# Altium PCB PCB_Ultrasonic_rx.pcbdoc
Units mil, origin at the board's own origin, x right, y up, seen from the top; angles counter-clockwise.
Board outline 4380 x 2865 mil, 2 copper layers (Top Layer, Bottom Layer); 54 components, 31 nets, 196 pads, 41 vias.
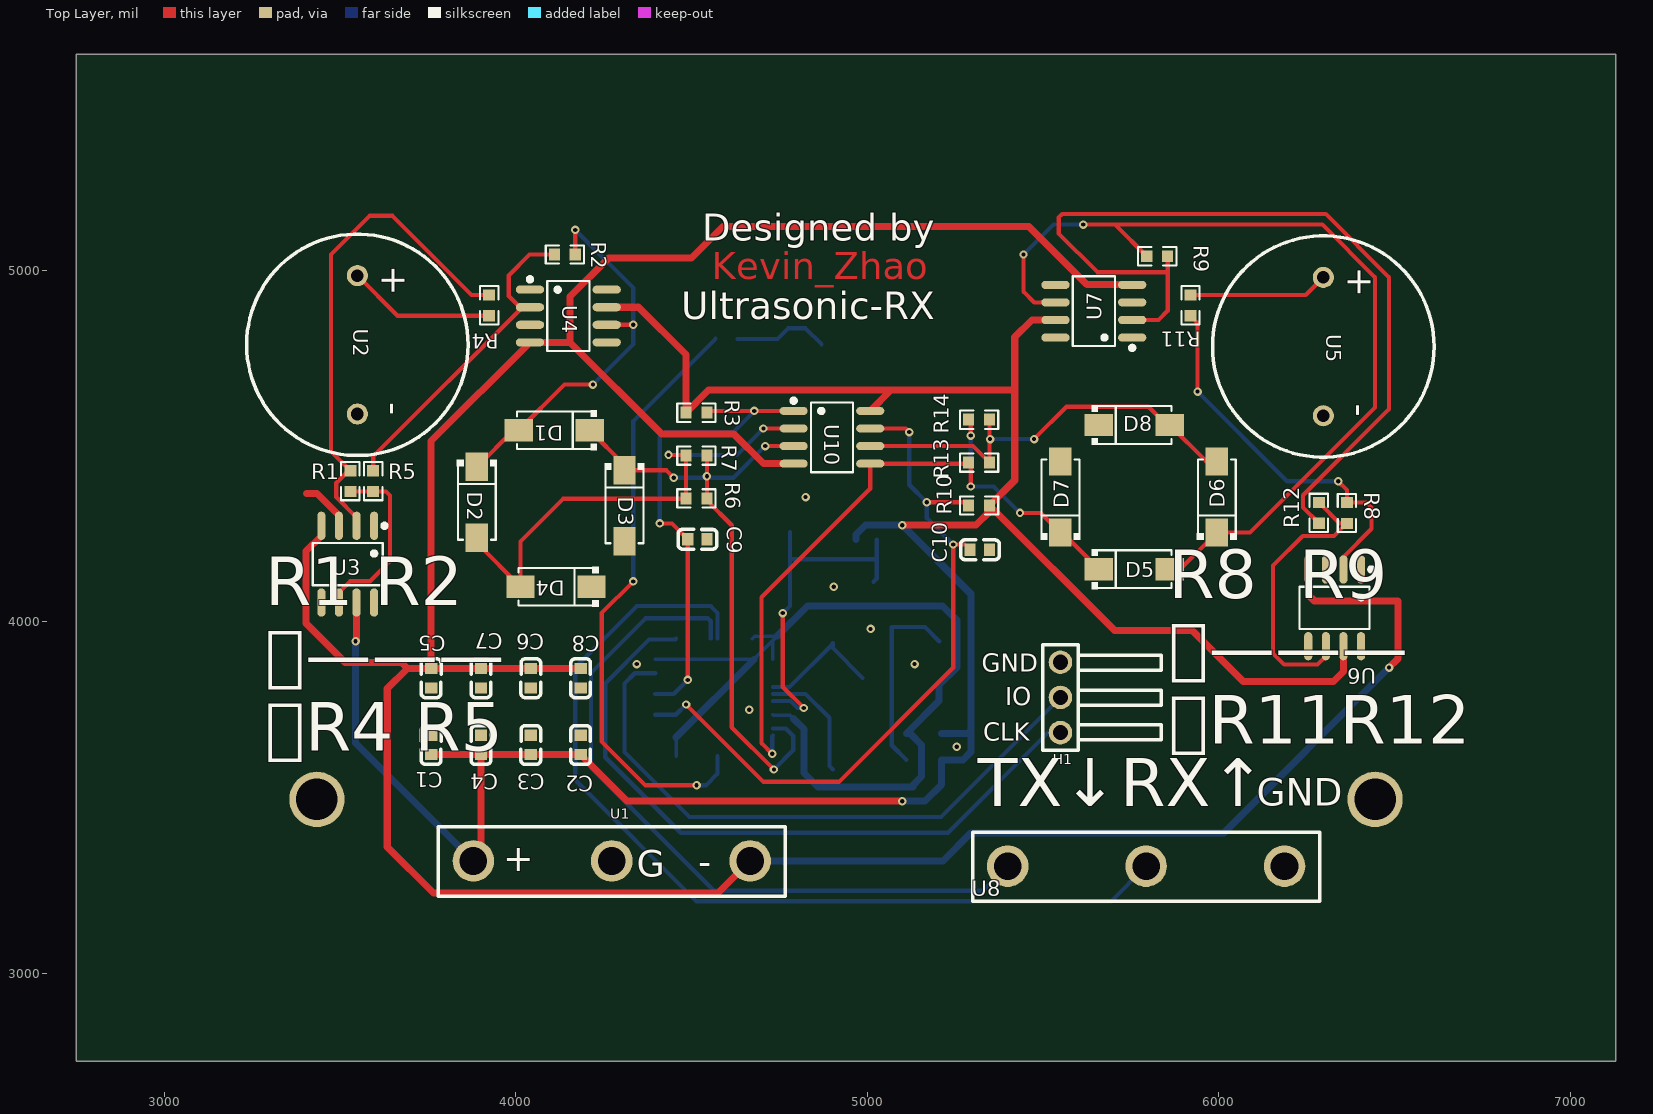
[diagram p0: Top Layer view]
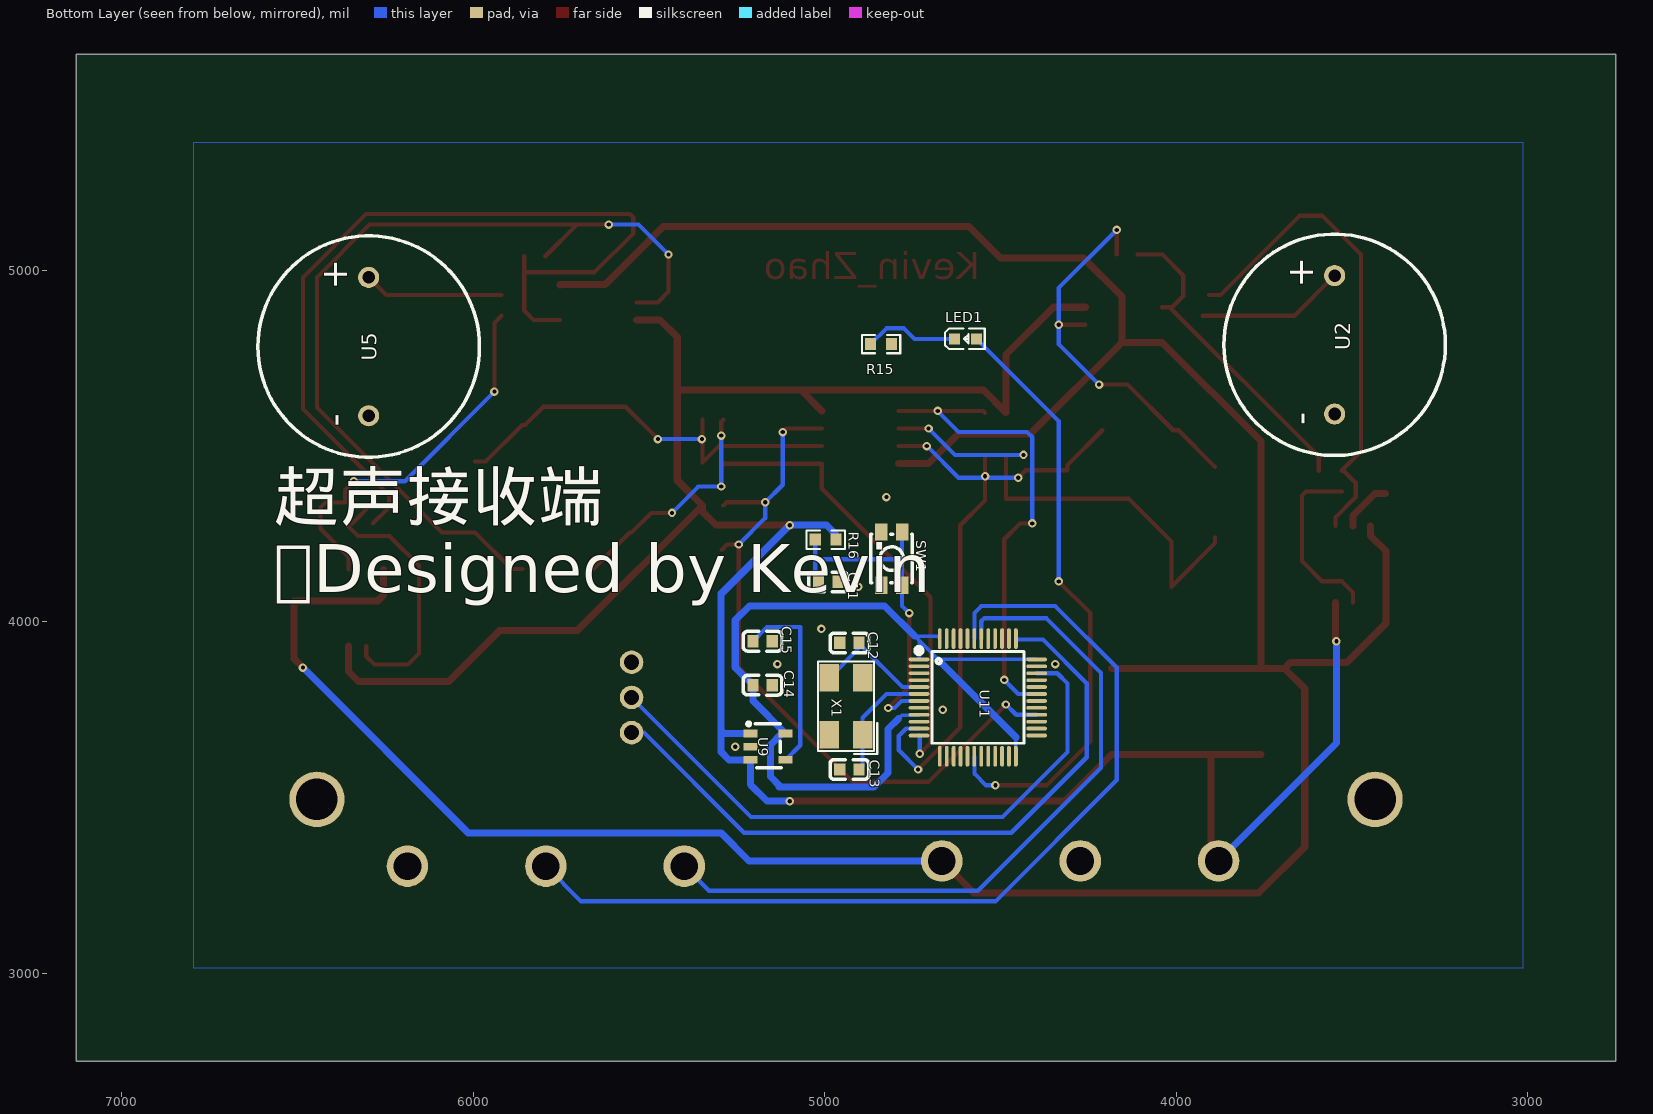
[diagram p1: Bottom Layer view, seen from below]

## Layer stack, top to bottom
Top Solder: solder mask 0.4, Solder Resist, Dk 3.5
Top Layer: signal copper 1.4
Dielectric 1: dielectric 12.6, FR-4, Dk 4.8
Bottom Layer: signal copper 1.4
Bottom Solder: solder mask 0.4, Solder Resist, Dk 3.5

## Board outline
7130,2750 2750,2750 2750,5615 7130,5615

## Components (designator, comment, footprint, x,y, rotation, side; value= is the part's Value field where it differs from the comment)
C1 "0.1u" C0603 3760,3649.8 r90 top
C2 "0.1u" C0603 4185.21,3649.8 r90 top
C3 "0.1u" C0603 4043.48,3649.8 r90 top
C4 "0.1u" C0603 3901.74,3649.8 r90 top
C5 "0.1u" C0603 3760,3840 r90 top
C6 "0.1u" C0603 4043.48,3840 r90 top
C7 "0.1u" C0603 3901.74,3840 r90 top
C8 "0.1u" C0603 4185.21,3840 r90 top
C9 "20p" C0603 4517.44,4235 r180 top
C10 "20p" C0603 5320.8,4205.21 r180 top
C11 "CAP_0603" C0603 4990.61,4113.82 r0 bottom
C12 "20p" C0603 4930.12,3940 r180 bottom
C13 "20p" C0603 4930.12,3580 r180 bottom
C14 "CAP_0603" C0603 5177.44,3820 r0 bottom
C15 "CAP_0603" C0603 5177.44,3945 r0 bottom
D1 "SS14FL" SMA_L4.4-W2.8-LS5.4-RD 4110,4545 r180 top
D2 "SS14FL" SMA_L4.4-W2.8-LS5.4-RD 3890,4340 r270 top
D3 "SS14FL" SMA_L4.4-W2.8-LS5.4-RD 4310,4330 r270 top
D4 "SS14FL" SMA_L4.4-W2.8-LS5.4-RD 4115,4100 r180 top
D5 "SS14FL" SMA_L4.4-W2.8-LS5.4-RD 5760,4150 r0 top
D6 "SS14FL" SMA_L4.4-W2.8-LS5.4-RD 5995,4355 r90 top
D7 "SS14FL" SMA_L4.4-W2.8-LS5.4-RD 5550,4355 r90 top
D8 "SS14FL" SMA_L4.4-W2.8-LS5.4-RD 5760,4560 r0 top
H1 "2.54-1*3P正弯针" HDR-TH_3P-P2.54-H-M-BW7.2-P 5550,3785 r90 top
LED1 "LED_0603-G" LED0603-RD 4600,4805 r180 bottom
R1 "22k" R0603 3530,4400.34 r270 top
R2 "22k" R0603 4140.34,5045 r0 top
R3 "4.7k" R0603 4514.64,4595 r0 top
R4 "1k" R0603 3925,4900.34 r90 top
R5 "1k" R0603 3595,4400.34 r90 top
R6 "120" R0603 4514.64,4351.11 r180 top
R7 "120" R0603 4514.64,4473.05 r0 top
R8 "22k" R0603 6365,4309.66 r270 top
R9 "22k" R0603 5825.34,5040 r180 top
R10 "4.7k" R0603 5318.61,4331.11 r180 top
R11 "1k" R0603 5920,4900.34 r270 top
R12 "1k" R0603 6285,4310 r270 top
R13 "120" R0603 5318.61,4453.05 r180 top
R14 "120" R0603 5318.61,4575 r180 top
R15 "Res_0603" R0603 4840.34,4790 r180 bottom
R16 "Res_0603" R0603 4997.71,4233.82 r180 bottom
SW1 "K2-1809SN-A4DW-06" KEY-SMD_4P-L3.5-W3.0-P1.50-LS4.6 4810,4180 r270 bottom
U1 "PAD-10-3" PAD-10-3 3780,3220 r0 top
U2 "超声传感器" 超声传感器 3550,4985 r270 top
U3 "OP07CSZ_C15360" SOIC-8_L4.9-W3.9-P1.27-LS6.0-BL 3522.63,4164.18 r180 top
U4 "OP07CSZ_C15360" SOIC-8_L4.9-W3.9-P1.27-LS6.0-BL 4150,4870 r270 top
U5 "超声传感器" 超声传感器 6297.76,4980 r270 top
U6 "OP07CSZ_C15360" SOIC-8_L4.9-W3.9-P1.27-LS6.0-BL 6330,4040 r180 top
U7 "OP07CSZ_C15360" SOIC-8_L4.9-W3.9-P1.27-LS6.0-BL 5645,4883.75 r90 top
U8 "PAD-10-3" PAD-10-3 5300,3205 r0 top
U9 "MIC5205-3.3YM5-TR" SOT-23-5_L3.0-W1.7-P0.95-LS2.8-TL 5161.73,3644.92 r180 bottom
U10 "LM393_C3294651" SOP-8_L5.0-W4.0-P1.27-LS6.0-BL 4900,4525 r270 top
U11 "STM32F103C6T6A" LQFP-48_L7.0-W7.0-P0.50-LS9.0-BL 4565,3785 r270 bottom
X1 "TAXM8M4QLDCDT2T" OSC-SMD_4P-L5.0-W3.2-BL 4940,3760 r90 bottom

## Footprints (in the part's own frame and the unit in brackets; to place one, negate y for a bottom-side part, rotate by r counter-clockwise, add the part's x,y. Pads: shape width x height; smd on the part's side, far side on the other; paste and mask are expansions set on the pad)
C0603 [mm]
  rect 0.8x0.9 smd: 1(-0.7,0) 2(0.7,0)
  silkscreen extent -1.41,-0.71 1.39,0.72
HDR-TH_3P-P2.54-H-M-BW7.2-P [mil]
  round 66.9 hole 43.3: 1(-100,0) 2(0,0) 3(100,0)
  silkscreen extent -150,-286 150,50
KEY-SMD_4P-L3.5-W3.0-P1.50-LS4.6 [mm]
  rect 1.25x0.9 smd: 1(-1.925,-0.75) 2(1.925,-0.75) 3(-1.925,0.75) 4(1.925,0.75)
  silkscreen extent -1.75,-1.5 1.75,1.5
LED0603-RD [mm]
  rect 0.8x0.8 smd: 1(-0.799,-0.003) 2(0.799,0.003)
  silkscreen extent -1.49,-0.75 1.39,0.76
LQFP-48_L7.0-W7.0-P0.50-LS9.0-BL [mm]
  oval 0.27x1.5 smd: 1(-2.75,-4.25) 2(-2.25,-4.25) 3(-1.75,-4.25) 4(-1.25,-4.25) 5(-0.75,-4.25) 6(-0.25,-4.25) 7(0.25,-4.25) 8(0.75,-4.25) 9(1.25,-4.25) 10(1.75,-4.25) 11(2.25,-4.25) 12(2.75,-4.25) 25(2.75,4.25) 26(2.25,4.25) 27(1.75,4.25) 28(1.25,4.25) 29(0.75,4.25) 30(0.25,4.25) 31(-0.25,4.25) 32(-0.75,4.25) 33(-1.25,4.25) 34(-1.75,4.25) 35(-2.25,4.25) 36(-2.75,4.25)
  oval 1.5x0.27 smd: 13(4.25,-2.75) 14(4.25,-2.25) 15(4.25,-1.75) 16(4.25,-1.25) 17(4.25,-0.75) 18(4.25,-0.25) 19(4.25,0.25) 20(4.25,0.75) 21(4.25,1.25) 22(4.25,1.75) 23(4.25,2.25) 24(4.25,2.75) 37(-4.25,2.75) 38(-4.25,2.25) 39(-4.25,1.75) 40(-4.25,1.25) 41(-4.25,0.75) 42(-4.25,0.25) 43(-4.25,-0.25) 44(-4.25,-0.75) 45(-4.25,-1.25) 46(-4.25,-1.75) 47(-4.25,-2.25) 48(-4.25,-2.75)
  silkscreen extent -3.59,-4.46 3.3,3.34
OSC-SMD_4P-L5.0-W3.2-BL [mil]
  rect 78.7x55.1 smd: 1(-80.7,-47.2) 2(80.7,-47.2) 3(80.7,47.2) 4(-80.7,47.2)
  silkscreen extent -136,-89 127,80
PAD-10-3 [mm]
  round 3 hole 2: 1(2.54,2.54) 2(12.54,2.54) 3(22.54,2.54)
  silkscreen extent 0,0 25.08,5
R0603 [mil]
  rect 31.75x34.02 smd: 1(-29.66,0) 2(29.66,0)
  silkscreen extent -55,-26 55,26
SMA_L4.4-W2.8-LS5.4-RD [mil]
  rect 80.57x63.78 smd: 1(-101,0) 2(101,0)
  silkscreen extent -121,-57 106,57
SOIC-8_L4.9-W3.9-P1.27-LS6.0-BL [mm]
  oval 0.588x2.045 smd: 1(-1.905,-2.772) 2(-0.635,-2.772) 3(0.635,-2.772) 4(1.905,-2.772) 5(1.905,2.772) 6(0.635,2.772) 7(-0.635,2.772) 8(-1.905,2.772)
  silkscreen extent -2.8,-2.92 2.53,1.52
SOP-8_L5.0-W4.0-P1.27-LS6.0-BL [mil]
  oval 22.6x80.14 smd: 1(-75,-108.97) 2(-25,-108.97) 3(25,-108.97) 4(75,-108.97) 5(75,108.97) 6(25,108.97) 7(-25,108.97) 8(-75,108.97)
  silkscreen extent -110,-115 99,60
SOT-23-5_L3.0-W1.7-P0.95-LS2.8-TL [mm]
  rect 1x0.55 smd: 1(-1.271,0.95) 2(-1.271,0) 3(-1.271,-0.95) 4(1.271,-0.95) 5(1.271,0.95)
  silkscreen extent -1.52,-1.52 0.97,1.78
超声传感器 [mil]
  round 60 hole 36: 1(0,0) 2(393.7,0)
  silkscreen extent -118,-315 512,315

## Free pads (board coordinates)
  round 157.48 hole 118.11: 1(3435,3495) 2(6445,3495)

## Via types
v1: diameter 24, hole 12, Top Layer to Bottom Layer, 41 vias

## Nets (pads, with @x,y where several pads share a name; then routed paths per layer and width w, separated by ;. In a path a pad name is that pad's centre, name@x,y a point inside that pad or via, vN(x,y) a via of type N, cw(c..) or ccw(c..) an arc to the next point about the centre after c; other vN are vias at no path point)
$1N68: R4.1 | length 422.4
  Top Layer w12: 3550,4985 3664.32,4870.68 R4.1
$1N69: R2.1 U4.2 | length 928.1
  Top Layer w12: 3595,4430 3595,4470 U4.2@4020,4895 ; U4.2 U4.2@4020,4895 ; R2.1 4040,5045 3980.59,4985.59 3980.59,4926.57 4012.17,4895 U4.2@4020,4895
$1N70: D2.1 U4.6 | length 1128.8
  Top Layer w12: D2.1 3994,4545 4009,4545 4139,4675 v1(4220,4675) ; 4170,5045 v1(4170,5115) ; U4.6 v1(4335,4845)
  Bottom Layer w12: v1(4170,5115) 4335,4950 v1(4335,4845) 4335,4790 v1(4220,4675)
$1N119: R7.1 U10.2 | length 1400.7
  Top Layer w12: 3890,4239 3890,4224 4014,4100 4014,4229 4135,4350 4483.87,4350 4484.98,4351.11 R7.1 4483.03,4475 v1(4435,4475) ; v1(4705,4550) U10.2
  Bottom Layer w12: v1(4435,4475) 4630,4475 v1(4705,4550)
$1N286: D6.1 U7.6 | length 2578.3
  Top Layer w12: v1(5445,5045) 5445,4939.34 5475.59,4908.75 U7.6 ; v1(5615,5130) 5705.68,5130 ; 5795.68,5040 5705.68,5130 ; 5861,4150 5891,4150 D6.1 6089,4254 6445,4610 6445,4980 6295,5130 5705.68,5130
  Bottom Layer w12: v1(5445,5045) 5530,5130 v1(5615,5130)
$1N293: R13.1 R14.1 U10.6 | length 1230.6
  Top Layer w12: U10.6 5301.32,4500 R13.1 v1@5348.27,4518.74 ; R14.1 v1@5348.27,4518.74 ; v1(5350,4520) 5349.53,4520 v1@5348.27,4518.74 ; v1(5475,4520) 5566.89,4611.89 5800.72,4611.89 5852.6,4560 5861,4560 5965,4456 5995,4456
  Bottom Layer w12: v1(5350,4520) v1(5475,4520)
$1N340: R12.1 U6.6 | length 814.7
  Top Layer w12: R12.1 6344.66,4280 6363.87,4280 ; U6.6 6305,3902.17 6281.43,3878.59 6186.41,3878.59 6155,3910 6155,4160 6239.12,4244.12 6327.99,4244.12 6363.87,4280 ; 6365,4280 6363.87,4280
$1N341: R11.1 | length 398.5
  Top Layer w12: R11.1 6247.76,4930 6297.76,4980
$1N7045: R1.1 U3.2 | length 1408.6
  Top Layer w12: U3.2 3547.63,4297.37 3490,4355 3490,4395 3525,4430 R1.1 3475,4485 3475,5045 3585,5155 3650,5155 3875,4930 3907,4930
$1N8031: R8.1 U6.2 | length 1085.5
  Top Layer w12: 5920,4870.68 5940,4850.68 v1(5940,4655) ; v1(6340,4400) 6365,4375 R8.1 6420.68,4339.32 6435,4325 6435,4265 6355,4185 U6.2
  Bottom Layer w12: v1(5940,4655) 6195,4400 v1(6340,4400)
$1N9081: R5.1 U3.6 | length 514.5
  Top Layer w12: U3.6 3497.63,4083.72 3529.21,4115.29 3585.29,4115.29 3642.63,4172.63 3642.63,4359.18 3631.14,4370.68 R5.1 3530,4370.68
$1N9152: R9.1 U7.2 | length 2505.8
  Top Layer w12: U7.2 5828.75,4858.75 5855,4885 5855,4994.81 ; R9.1 5855,4994.81 ; 6285,4280.34 6240,4325.34 6240,4360 6485,4605 6485,4980 6305,5160 5555,5160 5545,5150 5545,5105 5655.19,4994.81 5855,4994.81
$2N386: U11.5 X1.3 | length 354.2
  Bottom Layer w12: U11.5 4779.53,3814.53 4899.33,3934.33 4902.56,3934.33 ; 4902.56,3940 4902.56,3934.33 ; X1.3 4902.56,3925.34 4902.56,3934.33
$2N396: U11.6 | length 339.7
  Bottom Layer w12: U11.6 4825.16,3794.84 4892.8,3727.2 4892.8,3679.3 4892.8,3589.76 4902.56,3580
$2N1083: R16.1 SW1.3 SW1.4 U11.7 | length 1002.4
  Top Layer w12: v1(4760,4025) 4760,3815 v1(4820,3755)
  Bottom Layer w12: U11.7 4781.82,3775.16 4801.98,3755 v1(4820,3755) ; v1(4760,4025) 4780.47,4045.47 SW1.4 4780.47,4181.47 ; SW1.3 4780.47,4181.47 ; 5018.17,4113.82 5027.37,4123.02 5027.37,4177.82 ; R16.1 5027.37,4177.82 ; 4780.47,4181.47 4784.12,4177.82 5027.37,4177.82
$2N4470: U9.4 | length 546.3
  Bottom Layer w12: U9.4 5070,3649.19 5070,3985 5165,3985 5205,3945
$2N7969: U11.18 | length 1724
  Top Layer w12: v1(4335,4115) 4245,4025 4245,3660 4370,3535 v1(4515,3535)
  Bottom Layer w12: v1(4335,4115) 4335,4571.61 4568.52,4805.14 ; v1(4515,3535) 4541.66,3535 4574.84,3568.18 U11.18
$2N7989: LED1.1 R15.1 | length 269.6
  Bottom Layer w12: LED1.1 4744.86,4804.86 4775,4835 4825,4835 R15.1
+3V: C1.1 C2.1 C3.1 C4.1 R3.1 R10.1 U3.7 U4.7 U6.7 U7.7 U9.1 U9.3 U10.8 | length 7562.3
  Top Layer w20: v1(3545,3945) 3547.63,3947.63 U3.7 ; C1.1 C4.1 ; 3880,3320 3901.74,3341.74 C4.1 ; U4.7 4350,4895 4484.98,4760.02 R3.1 4549.34,4659.36 5068.33,4659.36 ; U10.8 5068.33,4659.36 ; v1(5100,3490) 4317.46,3490 C2.1 C3.1 C4.1 ; v1(5100,4275) 5310,4275 5348.27,4313.27 R10.1 ; U7.7 5468.75,4858.75 5420,4810 5420,4659.36 ; U6.7 6355,3858.59 6326.41,3830 6070,3830 5925,3975 5704.37,3975 R10.1 ; 5068.33,4659.36 5420,4659.36 ; R10.1 5420,4402.84 5420,4659.36
  Bottom Layer w20: v1(3545,3945) 3545,3655 3880,3320 ; 4968.05,4233.82 4968.05,4248.05 4995,4275 v1(5100,4275) 5295,4080 5295,3690.16 ; v1(5100,3490) 5165,3490 5211.79,3536.79 U9.3 5272.51,3607.51 5295,3630 5295,3690.16 ; U9.1 5287.16,3682.32 5295,3690.16
+3V3: U11.9 U11.24 U11.36 U11.48 | length 2557.7
  Bottom Layer w10: U11.36 4678.27,3893.27 4732.32,3947.32 ; U11.24 4456.73,3671.73 ; U11.48 4680.54,3959.59 4744.59,3959.59 4732.32,3947.32 ; U11.9 4733.11,3735 4780,3735 4790,3725 ; 4732.32,3893.27 4732.32,3947.32
  Bottom Layer w20: 4456.73,3671.73 4678.27,3893.27 ; 4744.59,3959.59 4830,4045 5215,4045 5255,4005 5255,3870 5205,3820 5205,3775.64 5111.68,3682.32 5122.68,3682.32 5155,3650 5155,3560 5130,3535 5130,3530 4860,3530 4820,3570 4820,3695 4790,3725
-3V: U1.3 U3.4 U4.4 U6.4 U7.4 U10.4 | length 9183.3
  Top Layer w20: U3.4 3447.63,4244.65 3404.06,4201.08 3404.06,3995.94 3515,3885 3675.12,3885 3692.56,3867.56 ; 4185.21,3867.56 4043.48,3867.56 3901.74,3867.56 3760,3867.56 ; U1.3 4576.35,3228.95 3766.05,3228.95 3635,3360 3635,3810 3692.56,3867.56 ; U10.4 4705,4450 4620,4535 4415,4535 4155,4795 ; U7.4 5752.9,4960 5625,4960 5460,5125 4590,5125 4500,5035 4265,5035 4155,4925 4155,4795 ; U6.4 6255,4076.89 6271.89,4060 6510,4060 6510,3895 v1(6485,3870) ; 3692.56,3867.56 3760,3867.56 ; 3760,3867.56 3760,4514.15 U4.4 4155,4795
  Bottom Layer w20: U1.3 5216.11,3320 5296.11,3400 6015,3400 v1(6485,3870)
GND: C5.1 C6.1 C7.1 C8.1 C9.1 C10.1 C11.1 C12.1 C13.1 C14.1 C15.1 D4.1 D8.1 H1.3 pad.1 pad.2 SW1.2 U1.2 U2.2 U3.3 U4.3 U5.2 U6.3 U7.3 U8.3 U9.2 U11.8 U11.23 U11.35 U11.44 U11.47 X1.2 X1.4 | length 147.6
  Top Layer w20: 3405,4365 3435,4365 3497.63,4302.37 U3.3
  other v1: 5255,3645 4665,3750 4345,3880 5135,3880 5010,3980 4905,4100 4825,4355
ITSL: D1.1 D3.1 R6.1 U10.3 U11.11 | length 1838.4
  Top Layer w12: D1.1 4310,4446 D3.1 4429,4431 v1(4450,4410) ; 4544.3,4473.05 v1(4544.3,4414.1) 4544.3,4345.7 4615,4275 4615,3700 v1(4735,3580) ; v1(4710,4500) U10.3
  Bottom Layer w12: v1(4450,4410) 4620,4410 v1(4710,4500) ; U11.11 4768.58,3696.42 4790,3675 4790,3635 v1(4735,3580)
ITSR: D5.1 D7.1 U10.5 U11.12 | length 2022
  Top Layer w12: v1(4730,3625) 4700,3655 4700,4070 5008.97,4378.97 U10.5 5285.89,4450 ; 5288.95,4453.05 5285.89,4450 ; 5288.95,4575 5295,4568.95 v1(5295,4530) ; v1(5295,4385) 5295,4440.89 5285.89,4450 ; v1(5435,4310) 5494,4310 D7.1 5555,4254 D5.1
  Bottom Layer w12: v1(4730,3625) 4730,3674.41 U11.12 ; v1(5295,4530) v1(5295,4385) 5360,4385 v1(5435,4310)
SEQL: U11.31 | length 1402.4
  Top Layer w12: v1(4410,4280) 4444.88,4280 4490,4234.88 v1(4490,3835) ; 4544.3,4595 4549.3,4600 v1(4678.76,4600) 4791.03,4600
  Bottom Layer w12: U11.31 4449.84,3794.84 v1(4490,3835) ; v1(4410,4280) 4410,4525 4425,4540 4620,4540 v1@4680,4600
SEQR: U10.7 U11.28 | length 2099.1
  Top Layer w12: v1(4485,3765) 4705,3545 4920,3545 5245,3870 v1(5245,4220) 5278.45,4220 5293.24,4205.21 ; U10.7 5110,4550 v1(5120,4540) ; v1(5170,4340) 5280.05,4340 5288.95,4331.11
  Bottom Layer w12: U11.28 4455.79,3735.79 v1(4485,3765) ; v1(5120,4540) 5120,4390 v1(5170,4340) 5170,4295 v1(5245,4220)
SWDCLK: U11.37 | length 1966.6
  Bottom Layer w12: U11.37 4454.41,3950 4380,3950 4255,3825 4255,3615 4470,3400 5230,3400 5515,3685 5550,3685
SWDIO: H1.2 U11.34 | length 1752.1
  Bottom Layer w12: U11.34 4338.9,3853.9 4310,3825 4310,3630 4495,3445 5210,3445 H1.2
UART_RX: U8.2 U11.43 | length 2686.4
  Bottom Layer w12: U11.43 4574.84,4025.16 4555,4045 4345,4045 4170,3870 4170,3550 4515,3205 5693.7,3205 U8.2
UART_TX: U11.42 | length 2086.2
  Bottom Layer w12: U11.42 4555.16,4001.82 4546.98,4010 4370,4010 4215,3855 4215,3585 4565,3235 5330,3235 5400,3305
"": 
pads on no net: C1.2 C2.2 C3.2 C4.2 C5.2 C6.2 C7.2 C8.2 C9.2 C10.2 C11.2 C12.2 C13.2 C14.2 C15.2 D1.2 D2.2 D3.2 D4.2 D5.2 D6.2 D7.2 D8.2 H1.1 LED1.2 R1.2 R2.2 R3.2 R4.2 R5.2 R6.2 R7.2 R8.2 R9.2 R10.2 R11.2 R12.2 R13.2 R14.2 R15.2 R16.2 SW1.1 U1.1 U2.1 U3.1 U3.5 U3.8 U4.1 U4.5 U4.8 U5.1 U6.1 U6.5 U6.8 U7.1 U7.5 U7.8 U8.1 U9.5 U10.1 U11.1 U11.2 U11.3 U11.4 U11.10 U11.13 U11.14 U11.15 U11.16 U11.17 U11.19 U11.20 U11.21 U11.22 U11.25 U11.26 U11.27 U11.29 U11.30 U11.32 U11.33 U11.38 U11.39 U11.40 U11.41 U11.45 U11.46 X1.1

## Polygon pours and split planes (outlines as drawn)
GND on Bottom Layer (solid, remove dead copper): 3015,3015 6795,3015 6795,5365 3015,5365
GND on Top Layer (solid, remove dead copper, pour order 1): 3000,3000 6775,3000 6775,5350 3000,5350

## Other copper
Top Layer:
  pour cut-out net SEQL: 4484,4199.28 4496,4199.28 4505.63,4217.28 4474.13,4217.28
  pour cut-out net SEQL: 4461.4,4254.99 4474.13,4221.05 4501.86,4252.72 4467.92,4265.44
  pour cut-out net +3V: 3807.72,3632.24 3777.72,3637.99 3777.72,3606.5 3807.72,3612.24
  pour cut-out net -3V: 3750,3913.31 3742.28,3883.31 3777.72,3883.31 3770,3913.31
  pour cut-out net -3V: 3712.28,3877.56 3712.28,3857.56 3742.28,3851.81 3742.28,3883.31
  pour cut-out net -3V: 3807.72,3877.56 3777.72,3883.31 3777.72,3851.81 3807.72,3857.56
  pour cut-out net $1N70: 3955.99,4515.47 3957.87,4500.38 3991.81,4513.11 3968.72,4549.42
  pour cut-out net $1N70: 4045.13,4589.62 4011.19,4576.89 4049.28,4555.58 4062.01,4589.53
  pour cut-out net ITSL: 4264.01,4500.47 4251.28,4534.42 4213.19,4513.11 4247.13,4500.38
  pour cut-out net $1N119: 3919.53,4185.99 3934.62,4187.87 3921.89,4221.81 3885.58,4198.72
  pour cut-out net $1N70: 3934.53,4494.01 3900.58,4481.28 3921.89,4443.19 3934.62,4477.13
  pour cut-out net ITSL: 4359.89,4425 4359.89,4437 4341.89,4452 4341.89,4410
  pour cut-out net ITSL: 4280.47,4484.01 4265.38,4482.13 4278.11,4448.19 4314.42,4471.28
  pour cut-out net $1N119: 3960.99,4144.53 3973.72,4110.58 4011.81,4131.89 3977.87,4144.62
  pour cut-out net $1N119: 4008,4149.89 3993,4131.89 4035,4131.89 4020,4149.89
  pour cut-out net $1N293: 5914.01,4515.48 5901.28,4549.42 5863.19,4528.11 5897.13,4515.38
  pour cut-out net $1N293: 5807.99,4596.13 5820.72,4562.19 5850.41,4591.89 5816.47,4604.62
  pour cut-out net ITSR: 5594.62,4205.9 5594.62,4222.87 5581.89,4256.81 5565.58,4213.72
  pour cut-out net ITSR: 5505.38,4290.13 5518.11,4256.19 5539.41,4294.28 5505.47,4307.01
  pour cut-out net $1N286: 5950.38,4217.87 5950.47,4200.99 5984.41,4213.72 5963.11,4251.81
  pour cut-out net $1N286: 6044.89,4248 6044.89,4260 6026.89,4275 6026.89,4233
  pour cut-out net $1N286: 5914.01,4181.5 5893.19,4181.89 5901.28,4118.11 5914.01,4164.53
  pour cut-out net ITSR: 5605.99,4194.53 5618.72,4160.59 5656.81,4181.89 5622.87,4194.62
  pour cut-out net $1N68: 3889.99,4864.68 3907.99,4854.8 3907.99,4886.56 3889.99,4876.68
  pour cut-out net $1N70: 4176,5080.01 4164,5080.01 4154.12,5062.01 4185.88,5062.01
  pour cut-out net $1N69: 4076.8,5051 4076.8,5039 4094.8,5027.99 4094.8,5062.01
  pour cut-out net $1N119: 4451.1,4356 4451.1,4344 4469.1,4334.1 4469.1,4368.11
  pour cut-out net $1N119: 4478.98,4386.11 4469.1,4368.11 4500.85,4368.11 4490.98,4386.11
  pour cut-out net ITSL: 4538.3,4386.11 4528.42,4368.11 4560.17,4368.11 4550.3,4386.11
  pour cut-out net ITSL: 4560.14,4321.37 4572.9,4325.59 4560.17,4359.53 4528.42,4334.1
  pour cut-out net SEQL: 4578.17,4594 4578.17,4606 4560.17,4612.01 4560.17,4579
  pour cut-out net +3V: 4509.06,4633.22 4500.85,4612.01 4500.85,4577.99 4522.06,4617.95
  pour cut-out net +3V: 4474.98,4642.01 4469.1,4612.01 4500.85,4612.01 4494.98,4642.01
  pour cut-out net ITSL: 4550.3,4438.05 4560.17,4456.05 4528.42,4456.05 4538.3,4438.05
  pour cut-out net $1N119: 4478.98,4438.05 4490.98,4438.05 4500.85,4456.05 4469.1,4456.05
  pour cut-out net $1N119: 4451.1,4481 4451.1,4469 4469.1,4456.05 4469.1,4490.06
  pour cut-out net ITSR: 5289,4418.05 5301,4418.05 5304.82,4436.05 5274,4436.05
  pour cut-out net ITSR: 5255.07,4444 5273.07,4436.05 5273.07,4470.06 5255.07,4456
  pour cut-out net $1N293: 5327.02,4482.79 5319.66,4473.17 5332.39,4439.23 5360.96,4470.06
  pour cut-out net $1N293: 5342.27,4488.06 5332.39,4470.06 5364.14,4470.06 5354.27,4488.06
  pour cut-out net $1N286: 5767.08,5060.12 5779.8,5026.18 5808.37,5057.01 5774.43,5069.74
  pour cut-out net $1N9152: 5849,5004.99 5861,5004.99 5870.88,5022.99 5839.12,5022.99
  pour cut-out net $1N8031: 5944.24,4854.92 5937.01,4883.37 5906.18,4854.8 5935.76,4846.44
  pour cut-out net $1N341: 5955.01,4924 5955.01,4936 5937.01,4945.88 5937.01,4914.12
  pour cut-out net ITSR: 5289,4539.99 5301,4539.99 5304.82,4557.99 5274,4557.99
  pour cut-out net $1N293: 5342.27,4539.99 5354.27,4539.99 5364.14,4557.99 5332.39,4557.99
  pour cut-out net SEQR: 5255.07,4346 5255.07,4334 5273.07,4319 5273.07,4348.11
  pour cut-out net +3V: 5372.35,4292.88 5385.35,4308.16 5364.14,4348.11 5364.14,4314.1
  pour cut-out net +3V: 5358.27,4313.27 5364.14,4314.1 5332.39,4314.1 5338.27,4313.27
  pour cut-out net +3V: 5372.35,4369.33 5364.14,4348.11 5364.14,4314.1 5385.35,4354.05
  pour cut-out net $1N68: 3548.12,4955.06 3581.82,4944.69 3590.31,4953.18 3579.94,4986.88
  pour cut-out net $1N341: 6267.81,4981.88 6257.45,4948.18 6265.94,4939.69 6299.63,4950.06
  pour cut-out net $1N69: 3988.2,4910.48 4012.17,4883.43 4012.17,4906.57 3996.68,4918.97
  pour cut-out net $1N69: 4004.18,4870.7 4012.17,4883.43 4012.17,4906.57 3990.94,4874.42
  pour cut-out net -3V: 3993.92,4762.21 4022.2,4762.21 4069.53,4783.43 4012.17,4783.43
  pour cut-out net -3V: 4105.36,4805 4069.53,4806.57 4069.53,4783.43 4105.36,4785
  pour cut-out net +3V: 4323.66,4885 4323.66,4905 4287.83,4906.57 4287.83,4883.43
  pour cut-out net $1N70: 4315.73,4839 4315.73,4851 4287.83,4856.57 4287.83,4833.43
  pour cut-out net $1N9152: 5810.73,4864.75 5782.83,4870.32 5782.83,4847.17 5810.73,4852.75
  pour cut-out net -3V: 5692.75,4970 5687.89,4950 5725.47,4947.17 5725.47,4970.32
  pour cut-out net +3V: 5471.34,4868.75 5471.34,4848.75 5507.17,4847.17 5507.17,4870.32
  pour cut-out net $1N286: 5479.27,4902.75 5507.17,4897.17 5507.17,4920.32 5479.27,4914.75
  pour cut-out net +3V: 3935.56,3340.02 3911.74,3415.41 3891.74,3423.33 3853.2,3372.62
  pour cut-out net -3V: 4608.46,3323.7 4589.34,3256.08 4603.48,3241.94 4671.1,3261.06
  pour cut-out net SEQL: 4734.69,4594 4762.26,4588.7 4762.26,4611.3 4734.69,4606
  pour cut-out net $1N119: 4734.69,4544 4762.26,4538.7 4762.26,4561.3 4734.69,4556
  pour cut-out net ITSL: 4734.69,4506 4734.69,4494 4762.26,4488.7 4762.26,4511.3
  pour cut-out net -3V: 4727,4460 4727,4440 4762.26,4438.7 4762.26,4461.3
  pour cut-out net +3V: 5027.34,4632.51 4980.2,4611.3 5037.74,4611.3 5055.62,4632.51
  pour cut-out net SEQR: 5065.31,4556 5037.74,4561.3 5037.74,4538.7 5065.31,4544
  pour cut-out net $1N293: 5065.31,4506 5037.74,4511.3 5037.74,4488.7 5065.31,4494
  pour cut-out net ITSR: 5002.97,4420.7 5014.97,4420.7 5029.97,4438.7 4987.97,4438.7
  pour cut-out net ITSR: 5065.31,4444 5065.31,4456 5037.74,4461.3 5037.74,4438.7
  pour cut-out net +3V: 4224.14,3597.46 4202.93,3606.5 4167.5,3606.5 4208.03,3585.28
  pour cut-out net +3V: 4137.5,3632.24 4137.5,3612.24 4167.5,3606.5 4167.5,3637.99
  pour cut-out net -3V: 3995.76,3857.56 4025.76,3851.81 4025.76,3883.31 3995.76,3877.56
  pour cut-out net -3V: 4091.19,3877.56 4061.19,3883.31 4061.19,3851.81 4091.19,3857.56
  pour cut-out net +3V: 3995.76,3612.24 4025.76,3606.5 4025.76,3637.99 3995.76,3632.24
  pour cut-out net +3V: 4091.19,3632.24 4061.19,3637.99 4061.19,3606.5 4091.19,3612.24
  pour cut-out net -3V: 3949.45,3857.56 3949.45,3877.56 3919.45,3883.31 3919.45,3851.81
  pour cut-out net -3V: 3854.02,3877.56 3854.02,3857.56 3884.02,3851.81 3884.02,3883.31
  pour cut-out net +3V: 3911.74,3576.5 3919.45,3606.5 3884.02,3606.5 3891.74,3576.5
  pour cut-out net +3V: 3949.45,3612.24 3949.45,3632.24 3919.45,3637.99 3919.45,3606.5
  pour cut-out net +3V: 3854.02,3632.24 3854.02,3612.24 3884.02,3606.5 3884.02,3637.99
  pour cut-out net -3V: 4137.5,3877.56 4137.5,3857.56 4167.5,3851.81 4167.5,3883.31
  pour cut-out net $1N7045: 3528.87,4324.62 3523.33,4313.18 3536.06,4302.02 3559.21,4302.02
  pour cut-out net -3V: 3429.37,4212.25 3459.21,4244.65 3436.06,4244.65 3414.84,4226.01
  pour cut-out net +3V: 3557.63,3990.52 3559.21,4026.35 3536.06,4026.35 3537.63,3990.52
  pour cut-out net $1N9081: 3521.6,4099.2 3513.12,4107.68 3486.06,4083.72 3509.21,4083.72
  pour cut-out net $1N340: 6343.75,4251.4 6377.69,4264.12 6347.99,4293.82 6335.26,4259.88
  pour cut-out net $1N340: 6344.66,4274 6347.99,4264.12 6347.99,4295.88 6344.66,4286
  pour cut-out net $1N8031: 6371,4373.2 6359,4373.2 6347.99,4355.2 6382.01,4355.2
  pour cut-out net $1N8031: 6400.01,4333.32 6400.01,4345.32 6382.01,4355.2 6382.01,4323.44
  pour cut-out net -3V: 6265,4084.64 6266.57,4120.47 6243.43,4120.47 6245,4084.64
  pour cut-out net +3V: 6365,3866.34 6366.57,3902.17 6343.43,3902.17 6345,3866.34
  pour cut-out net $1N340: 6281.03,3886.68 6289.52,3878.2 6316.57,3902.17 6293.43,3902.17
  pour cut-out net $1N9081: 3565.01,4364.68 3565.01,4376.68 3547.01,4386.56 3547.01,4354.8
  pour cut-out net $1N7045: 3504.88,4401.4 3538.82,4414.12 3512.99,4445.88 3500.26,4413.75
  pour cut-out net $1N7045: 3500.26,4451.25 3512.99,4417.31 3543.82,4445.88 3509.88,4458.6
  pour cut-out net $1N69: 3601,4463.88 3589,4463.88 3577.99,4445.88 3612.01,4445.88
  pour cut-out net $1N9081: 3630.01,4376.68 3612.01,4386.56 3612.01,4354.8 3630.01,4364.68
  pour cut-out net $1N9081: 3559.99,4364.68 3577.99,4354.8 3577.99,4386.56 3559.99,4376.68
  pour cut-out net $1N9152: 6255.26,4301.59 6267.99,4267.65 6298.82,4296.22 6264.88,4308.94
  pour cut-out net $1N340: 6305.12,4311.06 6314.74,4318.41 6302.01,4352.35 6271.18,4323.78
  pour cut-out net $1N119: 4712.94,4541 4725.4,4544 4725.4,4556 4712.94,4559
  pour cut-out net $1N119: 4442.94,4466 4455.4,4469 4455.4,4481 4442.94,4484
  pour cut-out net $1N70: 4212.06,4684 4199.6,4681 4199.6,4669 4212.06,4666
  pour cut-out net $1N70: 4327.06,4854 4314.6,4851 4314.6,4839 4327.06,4836
  pour cut-out net $1N70: 4161,5107.06 4164,5094.6 4176,5094.6 4179,5107.06
  pour cut-out net ITSL: 4450.75,4421.98 4439.82,4428.67 4431.33,4420.18 4438.02,4409.25
  pour cut-out net ITSL: 4717.94,4491 4730.4,4494 4730.4,4506 4717.94,4509
  pour cut-out net ITSL: 4535.3,4406.16 4538.3,4393.7 4550.3,4393.7 4553.3,4406.16
  pour cut-out net ITSL: 4553.3,4422.04 4550.3,4434.5 4538.3,4434.5 4535.3,4422.04
  pour cut-out net $1N286: 5436,5037.06 5439,5024.6 5451,5024.6 5454,5037.06
  pour cut-out net $1N286: 5622.94,5121 5635.4,5124 5635.4,5136 5622.94,5139
  pour cut-out net $1N293: 5486.98,4519.25 5493.67,4530.18 5485.18,4538.67 5474.25,4531.98
  pour cut-out net $1N293: 5357.76,4529.15 5354.27,4541.24 5342.27,4539.49 5339.95,4526.55
  pour cut-out net $1N293: 5339.95,4513.45 5342.27,4500.51 5354.27,4498.76 5357.76,4510.85
  pour cut-out net ITSR: 5442.94,4301 5455.4,4304 5455.4,4316 5442.94,4319
  pour cut-out net ITSR: 5304,4392.94 5301,4405.4 5289,4405.4 5286,4392.94
  pour cut-out net ITSR: 5304,4537.94 5301,4550.4 5289,4550.4 5286,4537.94
  pour cut-out net SEQR: 5120.75,4551.98 5114.24,4554.24 5105.76,4545.76 5108.02,4539.25
  pour cut-out net SEQR: 5177.94,4331 5190.4,4334 5190.4,4346 5177.94,4349
  pour cut-out net SEQR: 5236,4212.06 5239,4199.6 5251,4199.6 5254,4212.06
  pour cut-out net SEQR: 5252.94,4211 5265.4,4214 5265.4,4226 5252.94,4229
  pour cut-out net SEQL: 4417.94,4271 4430.4,4274 4430.4,4286 4417.94,4289
  pour cut-out net SEQL: 4686.7,4591 4699.16,4594 4699.16,4606 4686.7,4609
  pour cut-out net SEQL: 4670.83,4609 4658.36,4606 4658.36,4594 4670.83,4591
  pour cut-out net $2N1083: 4751,4017.06 4754,4004.6 4766,4004.6 4769,4017.06
  pour cut-out net $2N1083: 4820.75,3766.98 4809.82,3773.67 4801.33,3765.18 4808.02,3754.25
  pour cut-out net $2N7969: 4507.06,3544 4494.6,3541 4494.6,3529 4507.06,3526
  pour cut-out net $2N7969: 4323.02,4115.75 4316.33,4104.82 4324.82,4096.33 4335.75,4103.02
  pour cut-out net ITSL: 4735.75,3591.98 4724.82,3598.67 4716.33,3590.18 4723.02,3579.25
  pour cut-out net ITSR: 4730.75,3636.98 4719.82,3643.67 4711.33,3635.18 4718.02,3624.25
  pour cut-out net SEQR: 4484.25,3753.02 4495.18,3746.33 4503.67,3754.82 4496.98,3765.75
  pour cut-out net SEQL: 4499,3842.94 4496,3855.4 4484,3855.4 4481,3842.94
  pour cut-out net $1N8031: 5949,4662.94 5946,4675.4 5934,4675.4 5931,4662.94
  pour cut-out net $1N8031: 6339.25,4388.02 6350.18,4381.33 6358.67,4389.82 6351.98,4400.75
  text "Kevin_Zhao" at 4558.41,4974.32 h76.56
Bottom Layer:
  pour cut-out net +3V: 3883.7,3378.94 3816.08,3398.06 3801.94,3383.92 3821.06,3316.3
  pour cut-out net -3V: 4706.46,3275.71 4767.79,3310 4767.79,3330 4706.46,3364.29
  pour cut-out net $2N396: 4898.8,3621.95 4913.8,3639.95 4871.8,3639.95 4886.8,3621.95
  pour cut-out net $2N396: 4886.8,3727.2 4871.8,3718.65 4913.8,3718.65 4898.8,3727.2
  pour cut-out net $2N386: 4946.92,3889.46 4946.92,3872.49 4959.65,3838.55 4977.55,3880.05
  pour cut-out net $2N386: 4883.04,3909.56 4918.31,3922.28 4886.81,3922.28 4874.08,3917.57
  pour cut-out net $2N1083: 5033.37,4198.81 5043.24,4216.81 5011.49,4216.81 5021.37,4198.81
  pour cut-out net $2N1083: 5033.37,4149.53 5021.37,4149.53 5006.37,4131.53 5033.91,4131.53
  pour cut-out net $2N1083: 4786.47,4213.18 4798.19,4231.18 4762.75,4231.18 4774.47,4213.18
  pour cut-out net $2N1083: 4786.47,4061.6 4798.19,4079.6 4762.75,4079.6 4774.47,4061.6
  pour cut-out net $2N1083: 4786.47,4146.82 4774.47,4146.82 4762.75,4128.82 4798.19,4128.82
  pour cut-out net SWDCLK: 5527.87,3710.09 5515,3691 5515,3679 5527.87,3659.91
  pour cut-out net SWDIO: 5516.62,3787.09 5505.55,3749.03 5514.03,3740.55 5552.09,3751.62
  pour cut-out net +3V3: 4737.32,3913.59 4727.32,3913.59 4714.82,3898.59 4749.82,3898.59
  pour cut-out net ITSR: 4724,3653.41 4736,3653.41 4751,3671.41 4709,3671.41
  pour cut-out net +3V3: 4461.73,3658.7 4451.73,3658.7 4451.41,3641.89 4462.05,3641.89
  pour cut-out net +3V3: 4438.7,3888.27 4438.7,3898.27 4421.89,3898.59 4421.89,3887.95
  pour cut-out net SWDCLK: 4433.41,3956 4433.41,3944 4451.41,3929 4451.41,3971
  pour cut-out net +3V3: 5152.58,3666.56 5131.36,3693.15 5131.36,3671.49 5140.58,3650.28
  pour cut-out net +3V3: 5152.58,3709.08 5129.58,3714.36 5091.99,3693.15 5131.36,3693.15
  pour cut-out net $2N4470: 5096.61,3631.07 5079.64,3631.07 5091.99,3597.5 5131.36,3618.34
  pour cut-out net +3V: 5201.79,3566.68 5221.79,3566.68 5231.48,3596.68 5192.1,3596.68
  pour cut-out net +3V: 5261.48,3617.51 5231.48,3618.34 5231.48,3596.68 5261.48,3597.51
  pour cut-out net +3V: 5261.48,3672.32 5261.48,3692.32 5231.48,3693.15 5231.48,3671.49
  pour cut-out net +3V3: 5215,3775.64 5220.75,3802.28 5189.25,3802.28 5195,3775.64
  pour cut-out net +3V3: 5229.79,3858.93 5220.75,3837.72 5220.75,3802.28 5241.96,3842.82
  pour cut-out net $2N4470: 5176.52,3964.99 5189.25,3931.05 5216.98,3962.72 5183.04,3975.44
  pour cut-out net $2N7969: 4540.05,4785.14 4548.53,4776.66 4582.48,4789.39 4552.78,4819.09
  pour cut-out net $2N7989: 4665.22,4810.86 4647.22,4820.61 4647.22,4789.12 4665.22,4798.86
  pour cut-out net $2N7989: 4848.75,4819.74 4841.4,4810.12 4854.12,4776.18 4882.69,4807.01
  pour cut-out net UART_TX: 5341.06,3308.7 5325.76,3239.24 5334.24,3230.76 5403.7,3246.06
  pour cut-out net UART_RX: 5734.76,3308.7 5718.47,3238.25 5726.95,3229.77 5797.4,3246.06
  pour cut-out net $1N119: 4693.02,4550.75 4686.33,4539.82 4694.82,4531.33 4705.75,4538.02
  pour cut-out net $1N119: 4442.94,4466 4455.4,4469 4455.4,4481 4442.94,4484
  pour cut-out net $1N70: 4231.98,4674.25 4238.67,4685.18 4230.18,4693.67 4219.25,4686.98
  pour cut-out net $1N70: 4326,4837.06 4329,4824.6 4341,4824.6 4344,4837.06
  pour cut-out net $1N70: 4344,4852.94 4341,4865.4 4329,4865.4 4326,4852.94
  pour cut-out net $1N70: 4169.25,5103.02 4180.18,5096.33 4188.67,5104.82 4181.98,5115.75
  pour cut-out net ITSL: 4457.94,4401 4470.4,4404 4470.4,4416 4457.94,4419
  pour cut-out net ITSL: 4698.02,4500.75 4691.33,4489.82 4699.82,4481.33 4710.75,4488.02
  pour cut-out net ITSL: 4548.68,4402.93 4562.33,4404 4566.69,4416 4554.83,4419.85
  pour cut-out net ITSL: 4533.76,4419.85 4521.9,4416 4526.26,4404 4539.91,4402.93
  pour cut-out net $1N286: 5456.98,5044.25 5463.67,5055.18 5455.18,5063.67 5444.25,5056.98
  pour cut-out net $1N286: 5607.06,5139 5594.6,5136 5594.6,5124 5607.06,5121
  pour cut-out net $1N293: 5467.06,4529 5454.6,4526 5454.6,4514 5467.06,4511
  pour cut-out net $1N293: 5357.94,4511 5370.4,4514 5370.4,4526 5357.94,4529
  pour cut-out net ITSR: 5435.75,4321.98 5424.82,4328.67 5416.33,4320.18 5423.02,4309.25
  pour cut-out net ITSR: 5304,4392.94 5301,4405.4 5289,4405.4 5286,4392.94
  pour cut-out net ITSR: 5302.94,4376 5315.4,4379 5315.4,4391 5302.94,4394
  pour cut-out net ITSR: 5286,4522.06 5289,4509.6 5301,4509.6 5304,4522.06
  pour cut-out net SEQR: 5111,4532.06 5114,4519.6 5126,4519.6 5129,4532.06
  pour cut-out net SEQR: 5170.75,4351.98 5159.82,4358.67 5151.33,4350.18 5158.02,4339.25
  pour cut-out net SEQR: 5161,4332.06 5164,4319.6 5176,4319.6 5179,4332.06
  pour cut-out net SEQR: 5245.75,4231.98 5234.82,4238.67 5226.33,4230.18 5233.02,4219.25
  pour cut-out net SEQL: 4419,4287.94 4416,4300.4 4404,4300.4 4401,4287.94
  pour cut-out net SEQL: 4666.77,4599.88 4660.41,4588.9 4669.52,4581.03 4680.39,4588.11
  pour cut-out net $2N1083: 4771.98,4024.25 4778.67,4035.18 4770.18,4043.67 4759.25,4036.98
  pour cut-out net $2N1083: 4812.06,3764 4801.98,3761 4801.98,3749 4812.06,3746
  pour cut-out net $2N7969: 4522.94,3526 4535.4,3529 4535.4,3541 4522.94,3544
  pour cut-out net $2N7969: 4344,4122.94 4341,4135.4 4329,4135.4 4326,4122.94
  pour cut-out net ITSL: 4746.98,3579.25 4753.67,3590.18 4745.18,3598.67 4734.25,3591.98
  pour cut-out net ITSR: 4739,3632.94 4736,3645.4 4724,3645.4 4721,3632.94
  pour cut-out net SEQR: 4473.02,3765.75 4466.33,3754.82 4474.82,3746.33 4485.75,3753.02
  pour cut-out net SEQL: 4478.02,3835.75 4471.33,3824.82 4479.82,3816.33 4490.75,3823.02
  pour cut-out net $1N8031: 5939.25,4643.02 5950.18,4636.33 5958.67,4644.82 5951.98,4655.75
  pour cut-out net $1N8031: 6332.06,4409 6319.6,4406 6319.6,4394 6332.06,4391

## Silkscreen, mask and mechanical layers (free items; w line width, h text height)
Top Overlay:
  text "Designed by" at 4530.59,5084.32 h76.56
  text "Ultrasonic-RX" at 4471.41,4861.34 h77.88
  text "GND" at 5325.64,3857.48 h51.1
  text "IO" at 5392.88,3762.48 h51.1
  text "CLK" at 5330.64,3662.48 h51.1
  text "R8  R9 /  ——— /  R11R12" at 5857.6,3652.86 h137.95
  text "R1 R2 /  ——— /  R4 R5" at 3287.59,3632.66 h138.12
  text "GND" at 6108.35,3476.64 h77.88
  text "TX↓" at 5315.16,3475.08 h135.94
  text "RX↑" at 5720.16,3475.08 h135.94
  text "+" at 3965,3290.51 h75.94
  text "-" at 4520,3280.08 h75.94
  text "G" at 4345,3274.63 h75.94
Bottom Overlay:
  text "U2" at 3505.27,4773.21 h43.06 r270
  text "U5" at 6275.27,4743.21 h43.06 r270
  text "超声接收端 /  Designed by Kevin" at 6567.62,4084.04 h137.39
Top Solder:
  text "Kevin_Zhao" at 4558.41,4974.32 h76.56
Mechanical 1:
  lines w10: 3170,3165 6680,3165 6680,5245 3170,5245 3170,3165

## Text inside footprints (layer, text, board x,y; h text height)
U2: Bottom Overlay "+" at 3610.37,4950 h75.94 r270; Bottom Overlay "-" at 3610.37,4560 h75.94 r270; Top Overlay "+" at 3619.63,5015 h75.94 r270; Top Overlay "-" at 3619.63,4625 h75.94 r270
U5: Bottom Overlay "+" at 6358.13,4945 h75.94 r270; Bottom Overlay "-" at 6358.13,4555 h75.94 r270; Top Overlay "+" at 6367.39,5010 h75.94 r270; Top Overlay "-" at 6367.39,4620 h75.94 r270